# Altium PCB Tigershark 4D Systems Display Adapter.PcbDoc
Units mil, origin at the board's own origin, x right, y up, seen from the top; angles counter-clockwise.
Board outline 1865 x 495 mil, 2 copper layers (Top Layer, Bottom Layer); 8 components, 26 nets, 56 pads, 6 vias.
Unrouted connection lines stored in the file: 1.
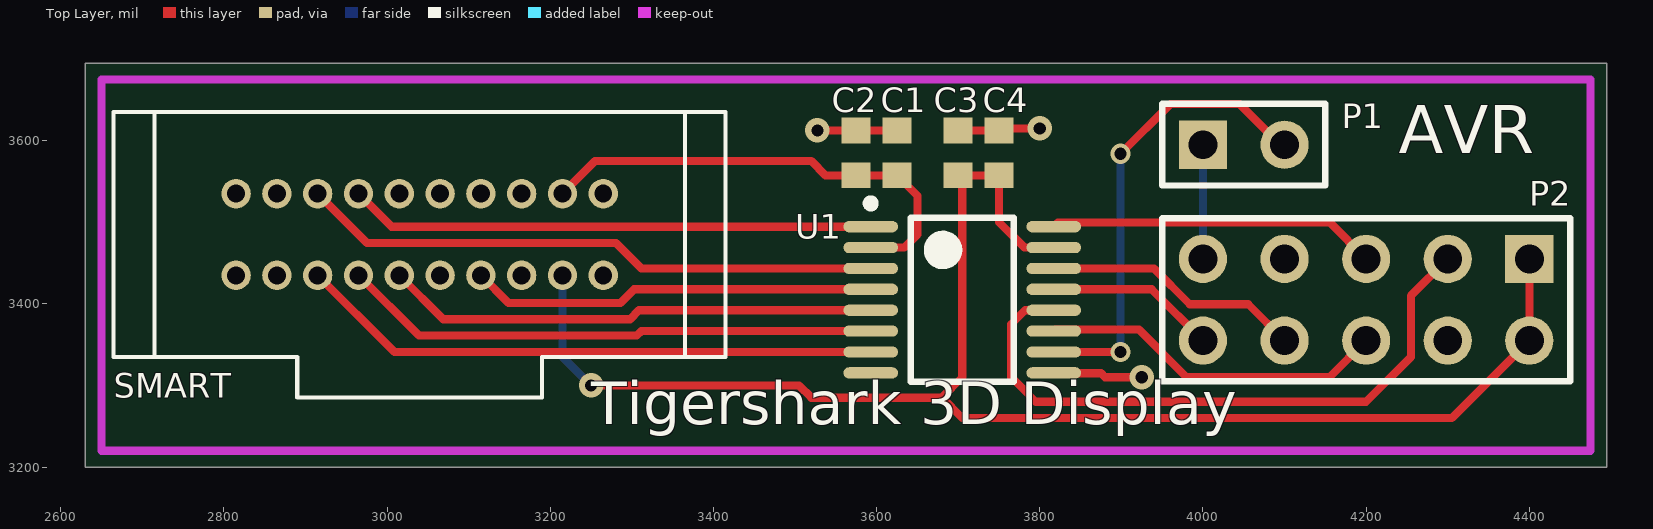
[diagram p0: Top Layer view]
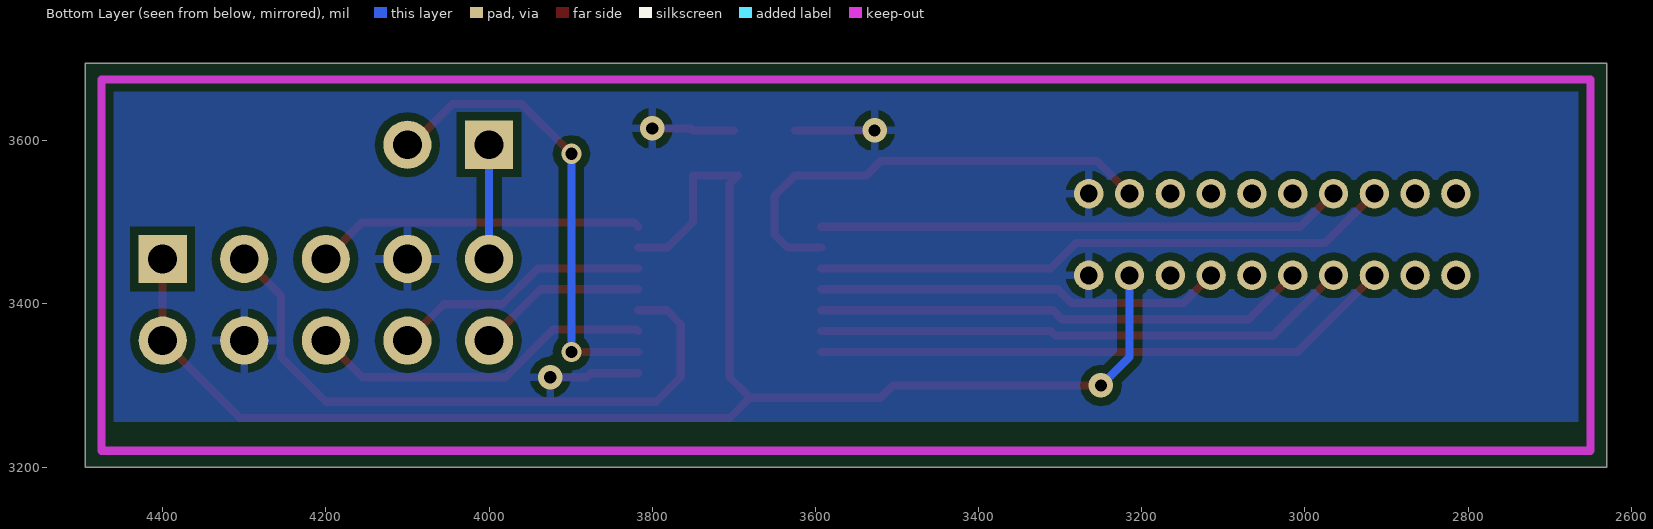
[diagram p1: Bottom Layer view, seen from below]

## Layer stack, top to bottom
Top Layer: signal copper 1.4
Dielectric: dielectric 12.6, FR-4, Dk 4.8
Bottom Layer: signal copper 1.4

## Board outline
2630,3235 2630,3695 4495,3695 4495,3200 2630,3200

## Design rules (kind name [scope] priority, off if disabled: settings)
Clearance [All] p1: gap=10
PolygonConnect [All] p1: connectstyle=Relief reliefconductorwidth=10 reliefentries=4 polygonreliefangle="90 Angle" airgapwidth=10
RoomDefinition "Tigershark 4DSystems Display Adapter" [InComponentClass('Tigershark 4DSystems Display Adapter')] p1: confinementstyle=ConfineIn formatcopy=TRUE lockcomponents=FALSE outline 2650,3250 4475,3250 4475,3675 2650,3675
RoutingVias [All] p1: holewidth=28 width=50 viastyle="Through Hole" minholewidth=28 minwidth=50 maxholewidth=28 maxwidth=50
SolderMaskExpansion [All] p1: expansion=4
Width [All] p1: maxlimit=10 minlimit=10 preferedwidth=10
28 further rules are at their usual default settings.

## Components (designator, comment, footprint, x,y, rotation, side; value= is the part's Value field where it differs from the comment)
C1 "0603" 1608[0603] 3625,3585 r270 top
C2 "0603" 1608[0603] 3575,3585 r270 top
C3 "0603" 1608[0603] 3700,3585 r270 top
C4 "0603" 1608[0603] 3750,3585 r270 top
P1 "Header 2" HDR1X2 4000,3595 r0 top
P2 "Header 5X2" HDR2X5 4400,3455 r180 top
SMART "10X2-0.1X0.05" "10X2-0.05X0.1 EXP" 3040,3485 r180 top
U1 "TXB0106 Level Shifter" TSOP65P640X120-16N 3705,3405 r0 top

## Footprints (in the part's own frame and the unit in brackets; to place one, negate y for a bottom-side part, rotate by r counter-clockwise, add the part's x,y. Pads: shape width x height; smd on the part's side, far side on the other; paste and mask are expansions set on the pad)
"10X2-0.05X0.1 EXP" [mil]
  round 36 hole 22: 1(225,50) 2(175,50) 3(125,50) 4(75,50) 5(25,50) 6(-25,50) 7(-75,50) 8(-125,50) 9(-175,50) 10(-225,50) 11(-225,-50) 12(-175,-50) 13(-125,-50) 14(-75,-50) 15(-25,-50) 16(25,-50) 17(75,-50) 18(125,-50) 19(175,-50) 20(225,-50)
  silkscreen extent -375,-150 375,200, body extent -375,-150 375,200, height 591
1608[0603] [mm] "Chip Capacitor, Body 1.6x0.8mm, IPC High Density"
  rect 0.8x0.9 smd: 1(-0.7,0) 2(0.7,0)
  body extent -0.87,-0.48 0.87,0.48, height 1.3
HDR1X2 [mm] "Connector; Header; 2 Position"
  rect 1.5x1.5 hole 0.9: 1(0,0)
  round 1.5 hole 0.9: 2(2.54,0)
  silkscreen extent -1.27,-1.27 3.81,1.27
HDR2X5 [mm] "Connector; Header; 5x2 Position"
  rect 1.5x1.5 hole 0.9: 1(0,0)
  round 1.5 hole 0.9: 2(0,2.54) 3(2.54,0) 4(2.54,2.54) 5(5.08,0) 6(5.08,2.54) 7(7.62,0) 8(7.62,2.54) 9(10.16,0) 10(10.16,2.54)
  silkscreen extent -1.27,-1.27 11.43,3.81
TSOP65P640X120-16N [mm] "TSOP, 16-Leads, Body 5.00x4.40mm, Pitch 0.65mm, IPC Medium Density"
  oval 1.7x0.35 smd: 1(-2.85,2.275) 2(-2.85,1.625) 3(-2.85,0.975) 4(-2.85,0.325) 5(-2.85,-0.325) 6(-2.85,-0.975) 7(-2.85,-1.625) 8(-2.85,-2.275) 9(2.85,-2.275) 10(2.85,-1.625) 11(2.85,-0.975) 12(2.85,-0.325) 13(2.85,0.325) 14(2.85,0.975) 15(2.85,1.625) 16(2.85,2.275)
  silkscreen extent -2.97,-2.55 1.6,3.12, body extent -2.25,-2.55 2.25,2.55, height 1.2

## Part data
C1 C2 C3 C4: library part "Cap Semi", "Capacitor (Semiconductor SIM Model)"
P1: "Header, 2-Pin"
P2: "Header, 5-Pin, Dual row"
U1: library part TXB0106, "TXB0106 - Bidriectional Opendrain/pushpull level shift"

## Via types
v1: diameter 30, hole 15, Top Layer to Bottom Layer, tented both sides, 4 vias
v2: diameter 25, hole 15, Top Layer to Bottom Layer, tented both sides, 2 vias

## Nets (pads, with @x,y where several pads share a name; then routed paths per layer and width w, separated by ;. In a path a pad name is that pad's centre, name@x,y a point inside that pad or via, vN(x,y) a via of type N, cw(c..) or ccw(c..) an arc to the next point about the centre after c; other vN are vias at no path point)
3.3VCC: C1.2 C2.2 SMART.12 U1.2 U1.8 | length 580.5
  Top Layer w10: SMART.12 3255,3575 3520,3575 3537.56,3557.44 C2.2 C1.2 3650,3532.44 3650,3485 3633.98,3468.98 U1.2
5VCC: C3.2 C4.2 P2.1 P2.2 SMART.9 U1.15 | length 1929.9
  Top Layer w10: v1(3250,3300) 3505,3300 3520,3285 3680,3285 ; C3.2@3695,3557.44 3705,3547.44 3705,3310 3680,3285 ; C3.2 C4.2 3750,3500 3781.02,3468.98 U1.15 ; P2.1 P2.2 4305,3260 3705,3260 3680,3285
  Bottom Layer w10: SMART.9 3215,3335 v1(3250,3300)
EXP_CS: SMART.1
EXP_INTERRUP1: SMART.16
EXP_INTERRUP2: SMART.15
EXP_SYNC: SMART.6
GND: C1.1 C2.1 C3.1 C4.1 P2.4 P2.7 SMART.10 SMART.11 U1.9 | length 308.6
  Top Layer w10: v1(3527.44,3612.56) C2.1 C1.1 ; C3.1 C4.1 3752.44,3615 v1(3800,3615) ; U1.9 3817.64,3315 3875,3315 3880,3310 v1(3925,3310)
GPIO0_EXP: SMART.7 U1.4 | length 498.8
  Top Layer w10: SMART.7 3148.98,3401.02 3286.02,3401.02 3302.8,3417.8 U1.4
GPIO0_EXP_5V: P2.10 U1.13 | length 208.8
  Top Layer w10: U1.13 3937.2,3417.8 P2.10
GPIO1_EXP: SMART.8
GPIO2_EXP: SMART.14
GPIO3_EXP: SMART.13
I2C_SCL: SMART.3 U1.7 | length 716.7
  Top Layer w10: SMART.3 3008.98,3341.02 U1.7
I2C_SCL_5V: P2.6 U1.11 | length 426.5
  Top Layer w10: U1.11 3819.11,3368.52 3921.48,3368.52 3980,3310 4155,3310 P2.6
I2C_SDA: SMART.18 U1.3 | length 715.7
  Top Layer w10: SMART.18 2975.43,3474.57 3280.43,3474.57 3311.61,3443.39 U1.3
I2C_SDA_5V: P2.8 U1.14 | length 319.4
  Top Layer w10: U1.14 3939.9,3443.39 3983.76,3399.53 4055.47,3399.53 P2.8
KRESET: SMART.5 U1.5 | length 604.8
  Top Layer w10: SMART.5 3068.98,3381.02 3297.74,3381.02 3308.92,3392.2 U1.5
KRESET_5V: P1.2 U1.10 | length 588.8
  Top Layer w10: U1.10 v2(3898.98,3341.02) ; v2(3898.98,3583.98) 3960,3645 4045,3645 4100,3590 P1.2@4100,3575
  Bottom Layer w10: v2(3898.98,3341.02) v2(3898.98,3583.98)
MISO: SMART.19
MOSI: SMART.20
NetP1_1: P1.1 P2.9 | length 120
  Bottom Layer w10: P2.9 P1.1@4000,3575
RXD1: SMART.17 U1.1 | length 644.5
  Top Layer w10: SMART.17 3005.43,3494.57 U1.1
RXD1_5V: P2.5 U1.16 | length 403.3
  Top Layer w10: U1.16 3822.17,3499.53 4155.47,3499.53 P2.5
SCLK: SMART.2
TXD1: SMART.4 U1.6 | length 660.8
  Top Layer w10: SMART.4 3038.98,3361.02 3306.02,3361.02 3311.61,3366.61 U1.6
TXD1_5V: P2.3 U1.12 | length 788.1
  Top Layer w10: U1.12 3782.2,3392.2 3765,3375 3765,3310.11 3795.11,3280 4200,3280 4255,3335 4255,3410 P2.3

## Polygon pours and split planes (outlines as drawn)
GND on Bottom Layer "Top Layer-No Net" (solid, remove dead copper, pour order 2): 2650,3675 2650,3240 4475,3240 4475,3675

## Keep-outs
Keep-Out Layer:
  lines w10: 2650,3220 4475,3220 4475,3675 2650,3675 2650,3220

## Silkscreen, mask and mechanical layers (free items; w line width, h text height)
Top Overlay:
  text "AVR" at 4240,3565 h100
  text "Tigershark 3D Display" at 3250,3235 h90
Mechanical 15:
  the board outline again, w10